# EAGLE board PT_2018_PB_4lyr_Rev1 (EAGLE 8.3.2)

Size 400.56 x 672.34 mm. Coordinates in mm from the lower left corner, seen from the top.
Outline: 0,456.44 0,672.34 165.1,672.34 165.1,456.44 0,456.44
Copper layers (1*2*15*16): Top 0.035mm / dielectric 1.5mm / Top-Mid(3v3) 0.035mm / dielectric 0.15mm / Bot-Mid(signal) 0.035mm / dielectric 0.2mm / Bottom 0.035mm
Design rules "default *": minimum track width 6mil, minimum drill 0.35mm, track to track 6mil, track to pad 6mil, pad to pad 6mil, via to via 6mil, smd to smd 6mil, copper to edge 40mil, drill to drill 6mil, minimum pad ring 10mil, minimum via ring 8mil, stop-mask expansion 4mil, vias tented up to drill 0mil, thermal gap 10mil
Net classes: 2 Ethernet: width 0.22 mm, clearance 0.152 mm

## Footprints (pad centres in the part's own frame; a part is rotated, then mirrored left to right if it is on the bottom)
OKI-78SR_HORIZ = drill 0.762 pad 1.422: 1 0,0; 2 -2.54,0; 3 -5.08,0
LARGE_TERMINAL_HOLE = drill 9.144 pad 18.288: P$1 0,0
C0603 = smd 1.1 x 1: 1 -0.85,0; 2 0.85,0
C1206 = smd 1.6 x 1.8: 1 -1.4,0; 2 1.4,0
0603 = smd 1.1 x 1: 1 -0.85,0; 2 0.85,0
0805 = smd 0.8 x 1.2: 1 -0.9,0; 2 0.9,0
E5-8,5 = drill 1.016 pad 2.54: + -2.54,0 | drill 1.016 pad 2.54 octagon: - 2.54,0
1206 = smd 1.6 x 1.8: 1 -1.4,0; 2 1.4,0
C_12.5MM = drill 0.7 square: + -2.5,0 | drill 0.7: - 2.5,0
CB429-17 = drill 1.397 long: A 8.89,0; C -8.89,0
APP45_12V_VERT_CONFIG = drill 4.064: GND 4.699,3.937; VCC 4.699,11.811
KEYSTONE-942 = drill 0.9: P$1 3.8,2.289; P$2 4.816,4.829; P$3 5.832,2.289; P$4 6.848,4.829; P$5 7.864,2.289; P$6 8.88,4.829; P$7 9.896,2.289; P$8 10.912,4.829 | hole 2.413: -0.023,-0.023; 14.76,-0.023
CON_2X5_50MIL = smd 0.74 x 2.6: P1 0,0; P2 0,4.008; P3 1.27,0; P4 1.27,4.008; P5 2.54,0; P6 2.54,4.008; P7 3.81,0; P8 3.81,4.008; P9 5.08,0; P10 5.08,4.008
APP45_12V_HORIZ_CONFIG = drill 4.064: 12V 28.194,3.937; GND 28.194,11.811
APP45_PCB_HORIZ_RIGHT = drill 4.064: P$1 28.194,3.969
CHIP-LED0603 = smd 0.8 x 0.8: A 0,-0.75; C 0,0.75
LED-1206 = smd 1.2 x 1.4: A -1.5,0; C 1.5,0
U-T48-QB-NO_TRIM = drill 1.3: 1 -25.4,7.62; 2 -25.4,0; 3 -25.4,-7.62 | drill 2: 4 25.4,-7.62; 8 25.4,7.62
D2PACK = smd 2.083 x 3.81: 1 2.54,-4.191; 2 7.62,-4.191 | smd 10.16 x 7.62: TAB 5.08,6.604
SOT323 = smd 0.7 x 0.7: 1 -0.65,-0.925; 2 0.65,-0.925; 3 0,0.925
DPAK = smd 1.6 x 3: 1 -2.28,-5.31; 3 2.28,-5.31 | smd 4.826 x 5.715: 4 0,1.588
R0603 = smd 1 x 1.1: 1 -0.85,0; 2 0.85,0
R1206 = smd 1.6 x 1.803: 1 -1.422,0; 2 1.422,0
SWITCH_6MM_6MM_TE_CON_SMD = smd 1.2 x 3.2: P$1 4.521,6.807; P$2 4.521,0; P$3 0,6.807; P$4 0,0
MOLEX-70543-0002 = drill 1.1 square: 1 2.54,0 | drill 1.1: 2 0,0; 3 -2.54,0
SO8 = smd 0.6 x 2.2: 1 -1.905,-2.6; 2 -0.635,-2.6; 3 0.635,-2.6; 4 1.905,-2.6; 5 1.905,2.6; 6 0.635,2.6; 7 -0.635,2.6; 8 -1.905,2.6
SOIC8_ACS711 = smd 1.92 x 2.2: 1 -1.27,-2.6; 4 1.27,-2.6 | smd 0.6 x 2.2: 5 1.905,2.6; 6 0.635,2.6; 7 -0.635,2.6; 8 -1.905,2.6
TO127P1435X457-8N = smd 0.864 x 2.692: 1 -3.81,-9.042; 2 -2.54,-9.042; 3 -1.27,-9.042; 4 0,-9.042; 5 1.27,-9.042; 6 2.54,-9.042; 7 3.81,-9.042 | smd 10.16 x 8.941: 8 0,0.152
SOIC16 = smd 0.6 x 1.55: 1 -4.445,-2.7; 2 -3.175,-2.7; 3 -1.905,-2.7; 4 -0.635,-2.7; 5 0.635,-2.7; 6 1.905,-2.7; 7 3.175,-2.7; 8 4.445,-2.7; 9 4.445,2.7; 10 3.175,2.7; 11 1.905,2.7; 12 0.635,2.7; 13 -0.635,2.7; 14 -1.905,2.7; 15 -3.175,2.7; 16 -4.445,2.7
TQFP-128 = smd 1.45 x 0.25: P$1 0,0; P$2 0,-0.4; P$3 0,-0.8; P$4 0,-1.2; P$5 0,-1.6; P$6 0,-2; P$7 0,-2.4; P$8 0,-2.8; P$9 0,-3.2; P$10 0,-3.6; P$11 0,-4; P$12 0,-4.4; P$13 0,-4.8; P$14 0,-5.2; P$15 0,-5.6; P$16 0,-6; P$17 0,-6.4; P$18 0,-6.8; P$19 0,-7.2; P$20 0,-7.6; P$21 0,-8; P$22 0,-8.4; P$23 0,-8.8; P$24 0,-9.2; P$25 0,-9.6; P$26 0,-10; P$27 0,-10.4; P$28 0,-10.8; P$29 0,-11.2; P$30 0,-11.6; P$31 0,-12; P$32 0,-12.4; P$65 15.45,-12.4; P$66 15.45,-12; P$67 15.45,-11.6; P$68 15.45,-11.2; P$69 15.45,-10.8; P$70 15.45,-10.4; P$71 15.45,-10; P$72 15.45,-9.6; P$73 15.45,-9.2; P$74 15.45,-8.8; P$75 15.45,-8.4; P$76 15.45,-8; P$77 15.45,-7.6; P$78 15.45,-7.2; P$79 15.45,-6.8; P$80 15.45,-6.4; P$81 15.45,-6; P$82 15.45,-5.6; P$83 15.45,-5.2; P$84 15.45,-4.8; P$85 15.45,-4.4; P$86 15.45,-4; P$87 15.45,-3.6; P$88 15.45,-3.2; P$89 15.45,-2.8; P$90 15.45,-2.4; P$91 15.45,-2; P$92 15.45,-1.6; P$93 15.45,-1.2; P$94 15.45,-0.8; P$95 15.45,-0.4; P$96 15.45,0 | smd 0.25 x 1.45: P$33 1.525,-13.925; P$34 1.925,-13.925; P$35 2.325,-13.925; P$36 2.725,-13.925; P$37 3.125,-13.925; P$38 3.525,-13.925; P$39 3.925,-13.925; P$40 4.325,-13.925; P$41 4.725,-13.925; P$42 5.125,-13.925; P$43 5.525,-13.925; P$44 5.925,-13.925; P$45 6.325,-13.925; P$46 6.725,-13.925; P$47 7.125,-13.925; P$48 7.525,-13.925; P$49 7.925,-13.925; P$50 8.325,-13.925; P$51 8.725,-13.925; P$52 9.125,-13.925; P$53 9.525,-13.925; P$54 9.925,-13.925; P$55 10.325,-13.925; P$56 10.725,-13.925; P$57 11.125,-13.925; P$58 11.525,-13.925; P$59 11.925,-13.925; P$60 12.325,-13.925; P$61 12.725,-13.925; P$62 13.125,-13.925; P$63 13.525,-13.925; P$64 13.925,-13.925; P$97 13.925,1.525; P$98 13.525,1.525; P$99 13.125,1.525; P$100 12.725,1.525; P$101 12.325,1.525; P$102 11.925,1.525; P$103 11.525,1.525; P$104 11.125,1.525; P$105 10.725,1.525; P$106 10.325,1.525; P$107 9.925,1.525; P$108 9.525,1.525; P$109 9.125,1.525; P$110 8.725,1.525; P$111 8.325,1.525; P$112 7.925,1.525; P$113 7.525,1.525; P$114 7.125,1.525; P$115 6.725,1.525; P$116 6.325,1.525; P$117 5.925,1.525; P$118 5.525,1.525; P$119 5.125,1.525; P$120 4.725,1.525; P$121 4.325,1.525; P$122 3.925,1.525; P$123 3.525,1.525; P$124 3.125,1.525; P$125 2.725,1.525; P$126 2.325,1.525; P$127 1.925,1.525; P$128 1.525,1.525
HX1198FNL = smd 0.76 x 1.67: P$1 0,0; P$2 1.27,0; P$3 2.54,0; P$4 3.81,0; P$5 5.08,0; P$6 6.35,0; P$7 7.62,0; P$8 8.89,0; P$9 8.89,8.55; P$10 7.62,8.55; P$11 6.35,8.55; P$12 5.08,8.55; P$13 3.81,8.55; P$14 2.54,8.55; P$15 1.27,8.55; P$16 0,8.55
SOIC8 = smd 0.6 x 2.2: 1 0.457,-0.813; 2 1.727,-0.813; 3 2.997,-0.813; 4 4.267,-0.813; 5 4.267,4.419; 6 2.997,4.419; 7 1.727,4.419; 8 0.457,4.419
OKI-78SR_HORIZ' = drill 0.9 pad 1.422: 1 0,0; 2 -2.54,0; 3 -5.08,0
SOT-223-6 = smd 0.6 x 2.2: 1 -2.54,-3.1; 2 -1.27,-3.1; 3 0,-3.1; 4 1.27,-3.1; 5 2.54,-3.1 | smd 3.5 x 2.2: 6 0,3.1
APP45_MOCO_VERT_CONFIG = drill 4.064: GND 3.937,3.175; VCC 3.937,11.049
BLOCK_3557-2 = drill 1.676 square: IN_1 16.637,-1.651; IN_2 16.637,-5.055; OUT_1 3.175,-1.651; OUT_2 3.175,-5.055
22-23-2021 = drill 1 long: 1 -1.27,0; 2 1.27,0
NDK3.2X2.5 = smd 1.4 x 1.2: P$1 0,0; P$2 2.2,0; P$3 2.2,1.6; P$4 0,1.6
CRYSTAL_32K_SMD = smd 2.5 x 1: P$1 0,1.25; P$2 0,-1.25 | smd 6 x 2.5: P$3 -6,0

## Placement (x,y rotation side)
3.3V-OKI  Q_OKI-78SR  [OKI-78SR_HORIZ]  288.29,74.17 0 top
5V-OKI  Q_OKI-78SR  [OKI-78SR_HORIZ]  309.88,74.17 0 top
BATT-NEG  TERMINAL_HOLE  [LARGE_TERMINAL_HOLE]  50.8,413.26 0 top
BATT-POS  TERMINAL_HOLE  [LARGE_TERMINAL_HOLE]  157.48,400.56 0 top
C1  0.1uF  [C0603]  345.44,-7.11 0 top  (outside the outline)
C2  0.1uF  [C0603]  353.06,-7.11 0 top  (outside the outline)
C3  0.1uF  [C0603]  360.68,-7.11 0 top  (outside the outline)
C4  0.1uF  [C0603]  368.3,-7.11 0 top  (outside the outline)
C5  1000pF  [C0603]  336.55,-7.11 0 top  (outside the outline)
C6  4700pF  [C1206]  157.48,-7.11 0 top  (outside the outline)
C7  0.1uF  [C0603]  375.92,-7.11 0 top  (outside the outline)
C8  0.1uF  [C0603]  383.54,-7.11 0 top  (outside the outline)
C9  0.1uF  [C0603]  391.16,-7.11 0 top  (outside the outline)
C10  0.1uF  [C0603]  398.78,-7.11 0 top  (outside the outline)
C11  0.1uF  [C0603]  406.4,-7.11 0 top  (outside the outline)
C12  0.1uF  [C0603]  3.81,-18.54 0 top  (outside the outline)
C13  1.0uF  [C0603]  11.43,-18.54 0 top  (outside the outline)
C14  2.2uF  [C0603]  19.05,-18.54 0 top  (outside the outline)
C15  12pF  [C0603]  57.15,-18.54 0 top  (outside the outline)
C16  12pF  [C0603]  64.77,-18.54 0 top  (outside the outline)
C17  0.1uF  [C0603]  26.67,-18.54 0 top  (outside the outline)
C18  12pF  [C0603]  72.39,-18.54 0 top  (outside the outline)
C19  12pF  [C0603]  80.01,-18.54 0 top  (outside the outline)
C20  0.1uF  [C0603]  34.29,-18.54 0 top  (outside the outline)
C21  0.1uF  [C0603]  41.91,-18.54 0 top  (outside the outline)
C22  2.2uF  [C0603]  49.53,-18.54 0 top  (outside the outline)
C23  10uF  [C1206]  165.1,-7.11 0 top  (outside the outline)
C24  10uF  [C1206]  171.45,-7.11 0 top  (outside the outline)
C25  10uF  [C1206]  177.8,-7.11 0 top  (outside the outline)
C26  10uF  [C1206]  184.15,-7.11 0 top  (outside the outline)
C27  10pF  [0603]  -35.56,-46.48 0 top  (outside the outline)
C.1  1nF  [0805]  232.41,-17.27 0 top  (outside the outline)
C.2  1nF  [0805]  236.22,-17.27 0 top  (outside the outline)
C.3  1nF  [0805]  240.03,-17.27 0 top  (outside the outline)
C.4  1nF  [0805]  243.84,-17.27 0 top  (outside the outline)
C.5  1nF  [0805]  247.65,-17.27 0 top  (outside the outline)
C.6  1nF  [0805]  251.46,-17.27 0 top  (outside the outline)
C.7  1nF  [0805]  255.27,-17.27 0 top  (outside the outline)
C.8  .1µF  [0805]  259.08,-17.27 0 top  (outside the outline)
C.9  .1µF  [0805]  262.89,-17.27 0 top  (outside the outline)
C.10  .1µF  [0805]  266.7,-17.27 0 top  (outside the outline)
C.11  .1µF  [0805]  270.51,-17.27 0 top  (outside the outline)
C.12  .1µF  [0805]  274.32,-17.27 0 top  (outside the outline)
C.13  .1µF  [0805]  278.13,-17.27 0 top  (outside the outline)
C.14  .1µF  [0805]  281.94,-17.27 0 top  (outside the outline)
C.15  .1µF  [0805]  285.75,-17.27 0 top  (outside the outline)
C.16  .1µF  [0805]  289.56,-17.27 0 top  (outside the outline)
C.17  .1µF  [0805]  293.37,-17.27 0 top  (outside the outline)
C.18  .1µF  [0805]  297.18,-17.27 0 top  (outside the outline)
C.19  .1µF  [0805]  300.99,-17.27 0 top  (outside the outline)
C.20  .1µF  [0805]  304.8,-17.27 0 top  (outside the outline)
C.21  .1µF  [0805]  308.61,-17.27 0 top  (outside the outline)
C.23  .1µF  [0805]  316.23,-17.27 0 top  (outside the outline)
C.24  .1µF  [0805]  320.04,-17.27 0 top  (outside the outline)
C.25  .1µF  [0805]  323.85,-17.27 0 top  (outside the outline)
C.26  330µF  [E5-8,5]  245.11,53.85 0 top
C.27  330µF  [E5-8,5]  275.59,53.85 0 top
C.28  330µF  [E5-8,5]  303.53,56.39 0 top
C.29  330µF  [E5-8,5]  336.55,53.85 0 top
C.30  330µF  [E5-8,5]  367.03,53.85 0 top
C.31  330µF  [E5-8,5]  397.51,53.85 0 top
C.35  2.2uF  [1206]  238.76,-7.11 0 top  (outside the outline)
C.36  2.2uF  [1206]  243.84,-7.11 0 top  (outside the outline)
C.37  2.2uF  [1206]  248.92,-7.11 0 top  (outside the outline)
C.39  1nF  [0805]  331.47,-17.27 0 top  (outside the outline)
C.40  1nF  [0805]  335.28,-17.27 0 top  (outside the outline)
C.41  1nF  [0805]  339.09,-17.27 0 top  (outside the outline)
C.42  1nF  [0805]  342.9,-17.27 0 top  (outside the outline)
C.43  1nF  [0805]  346.71,-17.27 0 top  (outside the outline)
C.44  1nF  [0805]  350.52,-17.27 0 top  (outside the outline)
C.45  10uF  [1206]  254,-7.11 0 top  (outside the outline)
C.46  10uF  [1206]  259.08,-7.11 0 top  (outside the outline)
C.47  10uF  [1206]  264.16,-7.11 0 top  (outside the outline)
C.48  .1uF  [0805]  354.33,-17.27 0 top  (outside the outline)
C.49  .1uF  [0805]  358.14,-17.27 0 top  (outside the outline)
C.50  .1uF  [0805]  361.95,-17.27 0 top  (outside the outline)
C.51  1mF  [C_12.5MM]  234.95,5.59 0 top
C.52  1mF  [C_12.5MM]  252.73,5.59 0 top
C.53  1mF  [C_12.5MM]  270.51,8.13 0 top
C.54  1mF  [C_12.5MM]  288.29,5.59 0 top
C.55  .1u  [0805]  365.76,-17.27 0 top  (outside the outline)
C.56  .1u  [0805]  369.57,-17.27 0 top  (outside the outline)
C.57  .1u  [0805]  373.38,-17.27 0 top  (outside the outline)
C.58  .1u  [0805]  377.19,-17.27 0 top  (outside the outline)
C.59  .1u  [0805]  381,-17.27 0 top  (outside the outline)
D1  1.5KE36A  [CB429-17]  209.55,28.45 0 top
D2  1.5KE36A  [CB429-17]  248.92,28.45 0 top
J1  APP_2POS_CONFIG12V_VERT  [APP45_12V_VERT_CONFIG]  219.71,235.46 0 top
J2  APP_2POS_CONFIG12V_VERT  [APP45_12V_VERT_CONFIG]  270.51,235.46 0 top
J3  APP_2POS_CONFIG12V_VERT  [APP45_12V_VERT_CONFIG]  321.31,235.46 0 top
J5  RJ45KEYSTONE-942  [KEYSTONE-942]  294.64,27.18 0 top
J6  JTAG_ARM_10PIN  [CON_2X5_50MIL]  358.14,5.59 0 top
J7  APP_2POS_CONFIG12V_HORIZ  [APP45_12V_HORIZ_CONFIG]  144.78,235.46 0 top
J8  APPPP45_PCB_HORIZ_RIGHT  [APP45_PCB_HORIZ_RIGHT]  361.95,171.96 0 top
LED1  GREEN  [CHIP-LED0603]  128.27,-9.65 0 top  (outside the outline)
LED2  GREEN  [CHIP-LED0603]  133.35,-9.65 0 top  (outside the outline)
LED3  ORANGE  [CHIP-LED0603]  123.19,-10.92 0 top  (outside the outline)
LED-1  [LED-1206]  170.18,-18.54 0 top  (outside the outline)
LED-2  [LED-1206]  175.26,-18.54 0 top  (outside the outline)
LED-3  [LED-1206]  180.34,-18.54 0 top  (outside the outline)
LED-4  [LED-1206]  185.42,-18.54 0 top  (outside the outline)
LED-5  [LED-1206]  190.5,-18.54 0 top  (outside the outline)
LED-6  [LED-1206]  195.58,-18.54 0 top  (outside the outline)
LED-7  [LED-1206]  200.66,-18.54 0 top  (outside the outline)
LED-9  [LED-1206]  210.82,-18.54 0 top  (outside the outline)
LED-10  [LED-1206]  215.9,-18.54 0 top  (outside the outline)
LED-11  [LED-1206]  220.98,-18.54 0 top  (outside the outline)
MARLIN-12V  UQW-12/20-T48NBS  [U-T48-QB-NO_TRIM]  111.76,118.62 0 top
NEMO-12V  UQW-12/20-T48NBS  [U-T48-QB-NO_TRIM]  187.96,118.62 0 top
Q1  Q_IRFS7437PbF  [D2PACK]  373.38,80.52 0 top
Q2  Q_IRFS7437PbF  [D2PACK]  12.7,51.31 0 top
Q3  Q_IRFS7437PbF  [D2PACK]  50.8,51.31 0 top
Q4  Q_IRFS7437PbF  [D2PACK]  88.9,51.31 0 top
Q5  Q_IRFS7437PbF  [D2PACK]  127,51.31 0 top
Q6  Q_IRFS7437PbF  [D2PACK]  165.1,51.31 0 top
Q7  Q_IRFS7437PbF  [D2PACK]  203.2,51.31 0 top
Q8  2N7002  [SOT323]  388.62,-18.54 0 top  (outside the outline)
Q10  MOSFET-NCHANNELFDD8780  [DPAK]  176.53,28.45 0 top
Q11  MOSFET-NCHANNELFDD8780  [DPAK]  185.42,28.45 0 top
Q12  2N7002  [SOT323]  396.24,-18.54 0 top  (outside the outline)
Q13  2N7002PW  [SOT323]  384.81,-18.54 0 top  (outside the outline)
R1  49.9  [R0603]  92.71,-18.54 0 top  (outside the outline)
R2  49.4  [R0603]  97.79,-18.54 0 top  (outside the outline)
R3  49.9  [R0603]  102.87,-18.54 0 top  (outside the outline)
R4  49.9  [R0603]  107.95,-18.54 0 top  (outside the outline)
R5  75  [R0603]  153.67,-18.54 0 top  (outside the outline)
R6  75  [R0603]  157.48,-18.54 0 top  (outside the outline)
R7  75  [R0603]  161.29,-18.54 0 top  (outside the outline)
R8  75  [R0603]  165.1,-18.54 0 top  (outside the outline)
R9  1M  [R1206]  228.6,-7.11 0 top  (outside the outline)
R10  330  [R0603]  113.03,-18.54 0 top  (outside the outline)
R11  330  [R0603]  118.11,-18.54 0 top  (outside the outline)
R12  1M  [R0603]  123.19,-18.54 0 top  (outside the outline)
R13  51  [R0603]  128.27,-18.54 0 top  (outside the outline)
R14  4.87k 1%  [R0603]  325.12,-7.11 0 top  (outside the outline)
R15  2k  [R0603]  133.35,-18.54 0 top  (outside the outline)
R16  100  [R0603]  138.43,-18.54 0 top  (outside the outline)
R17  10k  [R0603]  143.51,-18.54 0 top  (outside the outline)
R18  100k  [R0603]  86.36,-18.54 0 top  (outside the outline)
R19  330  [R0603]  148.59,-18.54 0 top  (outside the outline)
R.1  5kΩ  [1206]  269.24,-7.11 0 top  (outside the outline)
R.2  5kΩ  [1206]  274.32,-7.11 0 top  (outside the outline)
R.3  5kΩ  [1206]  279.4,-7.11 0 top  (outside the outline)
R.4  5kΩ  [1206]  284.48,-7.11 0 top  (outside the outline)
R.5  5kΩ  [1206]  289.56,-7.11 0 top  (outside the outline)
R.6  5kΩ  [1206]  294.64,-7.11 0 top  (outside the outline)
R.7  5kΩ  [1206]  299.72,-7.11 0 top  (outside the outline)
R.9  1kΩ  [1206]  309.88,-7.11 0 top  (outside the outline)
R.10  1kΩ  [1206]  314.96,-7.11 0 top  (outside the outline)
R.11  1kΩ  [1206]  320.04,-7.11 0 top  (outside the outline)
R.14  100k  [R1206]  190.5,-7.11 0 top  (outside the outline)
R.15  1k  [R1206]  209.55,-7.11 0 top  (outside the outline)
R.16  100k 1%  [R1206]  148.59,-7.11 0 top  (outside the outline)
R.17  10kΩ 1%  [R1206]  138.43,-7.11 0 top  (outside the outline)
R.18  1k  [R1206]  215.9,-7.11 0 top  (outside the outline)
R.19  100k  [R1206]  196.85,-7.11 0 top  (outside the outline)
S1  SWITCH_TACTILE  [SWITCH_6MM_6MM_TE_CON_SMD]  219.71,1.78 0 top
TEMP_1  SL03  [MOLEX-70543-0002]  308.61,5.59 0 top
U1  LT1910  [SO8]  410.21,8.13 0 top  (outside the outline)
U2  LT1910  [SO8]  5.08,-9.65 0 top  (outside the outline)
U3  LT1910  [SO8]  15.24,-9.65 0 top  (outside the outline)
U4  LT1910  [SO8]  25.4,-9.65 0 top  (outside the outline)
U5  LT1910  [SO8]  35.56,-9.65 0 top  (outside the outline)
U6  LT1910  [SO8]  45.72,-9.65 0 top  (outside the outline)
U7  LT1910  [SO8]  55.88,-9.65 0 top  (outside the outline)
U8  ACS722LLCTR-40AU-T  [SOIC8_ACS711]  66.04,23.37 0 top
U9  ACS722LLCTR-40AU-T  [SOIC8_ACS711]  76.2,23.37 0 top
U10  ACS722LLCTR-40AU-T  [SOIC8_ACS711]  86.36,23.37 0 top
U11  ACS722LLCTR-40AU-T  [SOIC8_ACS711]  96.52,23.37 0 top
U12  ACS722LLCTR-40AU-T  [SOIC8_ACS711]  106.68,23.37 0 top
U13  ACS722LLCTR-40AU-T  [SOIC8_ACS711]  116.84,23.37 0 top
U14  ACS722LLCTR-40AU-T  [SOIC8_ACS711]  127,23.37 0 top
U15  LT1910  [SO8]  66.04,-9.65 0 top  (outside the outline)
U16  LT1910  [SO8]  76.2,-9.65 0 top  (outside the outline)
U17  LM2678S-3.3  [TO127P1435X457-8N]  -22.86,-31.24 0 top  (outside the outline)
U18  ACS722LLCTR-40AU-T  [SOIC8_ACS711]  147.32,23.37 0 top
U19  ACS722LLCTR-40AU-T  [SOIC8_ACS711]  157.48,23.37 0 top
U20  ACS722LLCTR-40AU-T  [SOIC8_ACS711]  167.64,23.37 0 top
U21  MAX3232D  [SOIC16]  392.43,8.13 0 top
U22  TM4C1294NCPDT  [TQFP-128]  271.78,34.8 0 top
U23  HX1198FNL  [HX1198FNL]  345.44,3.05 0 top
U24  SLVU2.8-4  [SOIC8]  400.05,6.86 0 top
U25  OKI-78SR-5/1.5-W36HC  [OKI-78SR_HORIZ']  331.47,74.17 0 top
U26  TPS73733DCQ  [SOT-223-6]  87.63,-8.38 0 top  (outside the outline)
U27  OKI-78SR-5/1.5-W36HC  [OKI-78SR_HORIZ']  353.06,74.17 0 top
U$2  JACOB_SIG  [JACOB_SIG]  313.69,22.1 0 top
U$3  APP_2POS_CONFIGMOCO_VERT  [APP45_MOCO_VERT_CONFIG]  21.59,164.34 0 top
U$4  MRDT_LOGO  [MRDT_LOGO]  365.76,3.05 0 top
U$5  MOUNTING_HOLE#6  [#6_SCREW]  350.52,27.18 0 top
U$6  MOUNTING_HOLE#6  [#6_SCREW]  374.65,27.18 0 top
U$7  APP_2POS_CONFIGMOCO_VERT  [APP45_MOCO_VERT_CONFIG]  72.39,164.34 0 top
U$8  MOUNTING_HOLE#6  [#6_SCREW]  398.78,27.18 0 top
U$9  MOUNTING_HOLE#6  [#6_SCREW]  7.62,1.78 0 top
U$10  MOUNTING_HOLE#6  [#6_SCREW]  31.75,1.78 0 top
U$11  MOUNTING_HOLE#6  [#6_SCREW]  55.88,1.78 0 top
U$12  MOUNTING_HOLE#6  [#6_SCREW]  80.01,1.78 0 top
U$15  APP_2POS_CONFIGMOCO_VERT  [APP45_MOCO_VERT_CONFIG]  123.19,164.34 0 top
U$16  MOUNTING_HOLE#6  [#6_SCREW]  104.14,1.78 0 top
U$19  APP_2POS_CONFIGMOCO_VERT  [APP45_MOCO_VERT_CONFIG]  173.99,164.34 0 top
U$20  APP_2POS_CONFIGMOCO_VERT  [APP45_MOCO_VERT_CONFIG]  224.79,164.34 0 top
U$22  APP_2POS_CONFIGMOCO_VERT  [APP45_MOCO_VERT_CONFIG]  275.59,164.34 0 top
U$23  APP_2POS_CONFIGMOCO_VERT  [APP45_MOCO_VERT_CONFIG]  326.39,164.34 0 top
U$26  ATC_FUSE_BLOCK  [BLOCK_3557-2]  278.13,130.05 0 top
U$27  ATC_FUSE_BLOCK  [BLOCK_3557-2]  317.5,130.05 0 top
U$28  ATC_FUSE_BLOCK  [BLOCK_3557-2]  356.87,130.05 0 top
U$29  ATC_FUSE_BLOCK  [BLOCK_3557-2]  10.16,84.33 0 top
U$30  ATC_FUSE_BLOCK  [BLOCK_3557-2]  49.53,84.33 0 top
U$31  ATC_FUSE_BLOCK  [BLOCK_3557-2]  88.9,84.33 0 top
U$32  ATC_FUSE_BLOCK  [BLOCK_3557-2]  128.27,84.33 0 top
U$34  MOUNTING_HOLE#6  [#6_SCREW]  128.27,1.78 0 top
U$35  MOUNTING_HOLE#6  [#6_SCREW]  152.4,1.78 0 top
U$36  ATC_FUSE_BLOCK  [BLOCK_3557-2]  167.64,84.33 0 top
U$37  ATC_FUSE_BLOCK  [BLOCK_3557-2]  207.01,84.33 0 top
U$38  ATC_FUSE_BLOCK  [BLOCK_3557-2]  246.38,84.33 0 top
U$39  MOUNTING_HOLE#6  [#6_SCREW]  176.53,1.78 0 top
U$40  MOUNTING_HOLE#6  [#6_SCREW]  200.66,1.78 0 top
U$41  MRDT_LOGO  [MRDT_LOGO]  377.19,3.05 0 top
X1  22-23-2021  [22-23-2021]  331.47,6.86 0 top
Y1  NX3225GA  [NDK3.2X2.5]  226.06,-18.54 0 top  (outside the outline)
Y2  CRYATL_32K_SMD  [CRYSTAL_32K_SMD]  110.49,-8.38 0 top  (outside the outline)

## Library data of the parts
3.3V-OKI 5V-OKI BATT-NEG BATT-POS MARLIN-12V NEMO-12V Q1-Q7 U8-U14 U18-U20 = MRDT-2015-PowerBoard
C1-C26 C.26-C.31 R2-R19 R.14-R.19 = resistor
C27 = SparkFun-Capacitors; PROD_ID: CAP-11812
C.1-C.21 C.23-C.25 C.35-C.37 C.39-C.50 = SparkFun-Capacitors
C.51-C.54 = MRDT-2014-All
C.55-C.59 R.1-R.7 R.9-R.11 = SparkFun-Passives
D1 D2 = diode
J1-J3 J7 = MRDT-Connectors; COLOR1: YELLOW; COLOR2: BLACK
J5 J8 TEMP_1 = MRDT-Connectors
J6 = MRDT-Connectors; PARTNO: M50-3600542
LED1-LED3 = led
LED-1-LED-7 LED-9-LED-11 = SparkFun-LED
Q8 Q12 Q13 = SparkFun-DiscreteSemi; PROD_ID: TRANS-11151
Q10 Q11 = SparkFun-DiscreteSemi; PROD_ID: TRANS-09984
R1 = rcl
S1 = MRDT-UserInput
U1-U7 U15 U16 = Jake
U17 = LM2678S-3.3; AVAILABILITY: Good; DESCRIPTION: SIMPLE SWITCHER High Efficiency 5A Step-Down Voltage Regulator 7-DDPAK/TO-263 -40 to 125; MF: Texas Instruments; MP: LM2678S-3.3/NOPB; PACKAGE: TO-263-7 Texas Instruments; PRICE: 4.84 USD
U21 = MRDT-ICs; OPERATING_VOLTAGE: 3V3
U22 = MRDT-Microcontrollers
U23 U24 U26 = MRDT-ICs
U25 U27 = MRDT-ICs; VOUT: +5v
U$2 = Jacob Signature
U$3 U$7 U$15 U$19 U$20 U$22 U$23 = MRDT-Connectors; COLOR2: BLACK
U$4-U$6 U$8-U$12 U$16 U$26-U$32 U$34-U$40 = MRDT-Hardware
U$41 = MRDT-2015-General
X1 = con-molex; MF: MOLEX; MPN: 22-23-2021; OC_FARNELL: 1462926; OC_NEWARK: 25C3832
Y1 Y2 = MRDT-Passives

## Nets
3.3V: 3.3V-OKI.3 C.8.2 C.9.2 C.10.2 C.11.2 C.12.2 C.13.2 C.14.2 C.23.2 C.24.2 C.25.2 C.43.1 C.46.1 C.49.1 C.55.1 U8.8 U9.8 U10.8 U11.8 U12.8 U13.8 U14.8 U18.8 U19.8 U20.8 U21.16
5V: 5V-OKI.3 C.42.1 C.45.1 C.48.1 X1.2
12V-AUX-ACT: J3.VCC R.9.1 U18.4
12V-AUX-COM: J1.VCC R.10.1 U20.4
12V-AUX-LOGIC: J2.VCC R.11.1 U19.4
232_RX: TEMP_1.2 U21.13
232_TX: TEMP_1.3 U21.14
!RESET: J6.P10 R16.2 S1.P$3 S1.P$4
+3V3: C1.1 C2.1 C3.1 C4.1 C8.1 C9.1 C10.1 C11.1 C22.1 J6.P1 LED3.A R1.1 R2.1 R3.1 R4.1 R12.2 R13.2 R17.1 U22.P$7 U22.P$8 U22.P$9 U22.P$16 U22.P$26 U22.P$28 U22.P$39 U22.P$47 U22.P$51 U22.P$52 U22.P$69 U22.P$79 U22.P$90 U22.P$101 U22.P$113 U22.P$122 U23.P$2 U23.P$7 U26.2
+5V_ACT: C26.1 U27.3
+5V_LOGIC: C20.1 C24.1 R18.1 U25.3 U26.1
+12V_ACT: C25.1 J8.P$1 U27.1
+12V_LOGIC: C23.1 J7.12V U25.1
ACT-CTL: R.18.2 U22.P$109
ACT-SIG: U15.4 U22.P$31
ACT/COM-CTL: R.15.2 U22.P$103
COM-SIG: U16.4 U22.P$81
DRAIN-M1: C.15.2 Q1.TAB U1.6 U1.8 U8.4
DRAIN-M2: C.16.2 Q2.TAB U2.6 U2.8 U9.4
DRAIN-M3: C.17.2 Q3.TAB U3.6 U3.8 U10.4
DRAIN-M4: C.18.2 Q4.TAB U4.6 U4.8 U11.4
DRAIN-M5: C.19.2 Q5.TAB U5.6 U5.8 U12.4
DRAIN-M6: C.20.2 Q6.TAB U6.6 U6.8 U13.4
DRAIN-M7: C.21.2 Q7.TAB U7.6 U7.8 U14.4
EN0LED0: LED1.A U22.P$42
EN0LED1: LED2.A U22.P$46
EN0RXI_N [Ethernet]: R4.2 U22.P$53 U23.P$8
EN0RXI_P [Ethernet]: R3.2 U22.P$54 U23.P$6
EN0TXO_N [Ethernet]: R2.2 U22.P$56 U23.P$3
EN0TXO_P [Ethernet]: R1.2 U22.P$57 U23.P$1
FAN_CTL_1: Q13.1 U22.P$3
FILTER-M1: C.1.1 U8.6
FILTER-M2: C.2.1 U9.6
FILTER-M3: C.3.1 U10.6
FILTER-M4: C.4.1 U11.6
FILTER-M5: C.5.1 U12.6
FILTER-M6: C.6.1 U13.6
FILTER-M7: C.7.1 U14.6
GATE-M1: Q1.1 U1.5
GATE-M2: Q2.1 U2.5
GATE-M3: Q3.1 U3.5
GATE-M4: Q4.1 U4.5
GATE-M5: Q5.1 U5.5
GATE-M6: Q6.1 U6.5
GATE-M7: Q7.1 U7.5
GND: 3.3V-OKI.2 5V-OKI.2 BATT-NEG.P$1 C1.2 C2.2 C3.2 C4.2 C6.2 C7.2 C8.2 C9.2 C10.2 C11.2 C12.2 C13.2 C14.2 C15.2 C16.2 C17.2 C18.2 C19.2 C20.2 C21.2 C22.2 C23.2 C24.2 C25.2 C26.2 C.1.2 C.2.2 C.3.2 C.4.2 C.5.2 C.6.2 C.7.2 C.8.1 C.9.1 C.10.1 C.11.1 C.12.1 C.13.1 C.14.1 C.15.1 C.16.1 C.17.1 C.18.1 C.19.1 C.20.1 C.21.1 C.23.1 C.24.1 C.25.1 C.26.- C.27.- C.28.- C.29.- C.30.- C.31.- C.35.2 C.36.2 C.37.2 C.39.2 C.40.2 C.41.2 C.42.2 C.43.2 C.44.2 C.45.2 C.46.2 C.47.2 C.48.2 C.49.2 C.50.2 C.51.- C.52.- C.53.- C.54.- C.55.2 C.58.2 C.59.2 D1.A D2.A J1.GND J2.GND J3.GND J6.P3 J6.P5 J7.GND LED-1.C LED-2.C LED-3.C LED-4.C LED-5.C LED-6.C LED-7.C LED-9.C LED-10.C LED-11.C MARLIN-12V.3 MARLIN-12V.4 NEMO-12V.3 NEMO-12V.4 Q8.2 Q12.2 Q13.2 R9.1 R10.2 R11.2 R14.1 R19.2 R.14.2 R.17.1 R.19.2 S1.P$1 S1.P$2 TEMP_1.1 U1.1 U2.1 U3.1 U4.1 U5.1 U6.1 U7.1 U8.5 U9.5 U10.5 U11.5 U12.5 U13.5 U14.5 U15.1 U16.1 U17.8 U18.5 U19.5 U20.5 U21.15 U22.P$10 U22.P$17 U22.P$48 U22.P$55 U22.P$58 U22.P$80 U22.P$114 U25.2 U26.3 U26.6 U27.2 U$3.GND U$7.GND U$15.GND U$19.GND U$20.GND U$22.GND U$23.GND
IMEAS-ACT: U20.7 U22.P$13
IMEAS-COM: U19.7 U22.P$15
IMEAS-LOGIC: U18.7 U22.P$14
IMEAS-M1: U8.7 U22.P$21
IMEAS-M2: U9.7 U22.P$20
IMEAS-M3: U10.7 U22.P$19
IMEAS-M4: U11.7 U22.P$125
IMEAS-M5: U12.7 U22.P$18
IMEAS-M6: U13.7 U22.P$120
IMEAS-M7: U14.7 U22.P$121
LEDLINE-M1: LED-1.A R.1.2
LEDLINE-M2: LED-2.A R.2.2
LEDLINE-M3: LED-3.A R.3.2
LEDLINE-M4: LED-4.A R.4.2
LEDLINE-M5: LED-5.A R.5.2
LEDLINE-M6: LED-6.A R.6.2
LEDLINE-M7: LED-7.A R.7.2
N$1: C.26.+ NEMO-12V.8 U$30.IN_1 U$30.IN_2
N$2: C27.2 U17.3
N$3: MARLIN-12V.2 Q12.3
N$4: C.41.1 U20.6
N$5: C27.1 U17.1
N$6: LED-9.A R.9.2
N$7: LED-11.A R.11.2
N$8: NEMO-12V.2 Q8.3
N$9: C.28.+ C.29.+ C.30.+ C.31.+ C.36.1 C.37.1 MARLIN-12V.8 U$31.IN_1 U$31.IN_2 U$32.IN_1 U$32.IN_2
N$11: C.58.1 U21.2
N$12: C.39.1 U18.6
N$15: C.40.1 U19.6
N$16: LED-10.A R.10.2
N$17: Q11.1 U16.5
N$18: C.27.+ C.35.1 U18.1 U$30.OUT_1 U$30.OUT_2
N$19: Q11.3 U19.1
N$20: Q11.4 U16.6 U16.8 U$31.OUT_1 U$31.OUT_2
N$21: Q10.4 U15.6 U15.8 U$32.OUT_1 U$32.OUT_2
N$22: Q10.3 U20.1
N$25: Q8.1 R.18.1 R.19.1
N$28: Q10.1 U15.5
N$40: C.56.1 U21.1
N$42: C.56.2 U21.3
N$43: C.57.1 U21.4
N$44: C.57.2 U21.5
N$45: C.59.1 U21.6
N$66: Q13.3 X1.1
N$114: Q12.1 R.14.1 R.15.1
N_$1: R5.2 U23.P$15
N_$3: R6.2 U23.P$10
N_$4: J5.P$7 U23.P$14 U24.2 U24.7
N_$5: J5.P$6 U23.P$11 U24.3 U24.6
N_$6: J5.P$8 U23.P$16 U24.1 U24.8
N_$7: J5.P$3 U23.P$9 U24.4 U24.5
N_$8: LED2.C R11.1
N_$9: LED1.C R10.1
N_$10: C7.1 R13.1 U22.P$68
N_$11: J5.P$4 J5.P$5 R7.2
N_$12: R12.1 U22.P$64
N_$13: J5.P$1 J5.P$2 R8.2
N_$14: C5.1 R5.1 R6.1 R7.1 R8.1
N_$15: C5.2 C6.1 R9.2
N_$16: C12.1 C13.1 C14.1 U22.P$87 U22.P$115
N_$17: R15.2 U22.P$89
N_$18: C16.1 U22.P$88 Y1.P$3
N_$19: R14.2 U22.P$59
N_$20: C17.1 R16.1 R17.2 U22.P$70
N_$21: C15.1 R15.1 Y1.P$1
N_$22: C18.1 U22.P$67 Y2.P$2
N_$23: C19.1 U22.P$66 Y2.P$1
N_$25: R18.2 U26.5
N_$26: LED3.C R19.1
N_$27: C21.1 U26.4
RX: J6.P7 U22.P$33
SER_RX: U21.12 U22.P$25
SER_TX: U21.11 U22.P$24
SIG-M1: U1.4 U22.P$106
SIG-M2: U2.4 U22.P$41
SIG-M3: U3.4 U22.P$29
SIG-M4: U4.4 U22.P$104
SIG-M5: U5.4 U22.P$30
SIG-M6: U6.4 U22.P$61
SIG-M7: U7.4 U22.P$60
SOURCE-M1: Q1.2 R.1.1 U$3.VCC
SOURCE-M2: Q2.2 R.2.1 U$23.VCC
SOURCE-M3: Q3.2 R.3.1 U$7.VCC
SOURCE-M4: Q4.2 R.4.1 U$15.VCC
SOURCE-M5: Q5.2 R.5.1 U$19.VCC
SOURCE-M6: Q6.2 R.6.1 U$20.VCC
SOURCE-M7: Q7.2 R.7.1 U$22.VCC
TARGET_TCK/SWCLK: J6.P4 U22.P$100
TARGET_TDI: J6.P8 U22.P$98
TARGET_TDO/SWO: J6.P6 U22.P$97
TARGET_TMS/SWDIO: J6.P2 U22.P$99
TX: J6.P9 U22.P$34
V_BATT: 3.3V-OKI.1 5V-OKI.1 BATT-POS.P$1 C.44.1 C.47.1 C.50.1 C.51.+ C.52.+ C.53.+ C.54.+ D1.C D2.C MARLIN-12V.1 NEMO-12V.1 R.16.2 U17.2 U$26.IN_1 U$26.IN_2 U$27.IN_1 U$27.IN_2 U$28.IN_1 U$28.IN_2 U$29.IN_1 U$29.IN_2 U$36.IN_1 U$36.IN_2 U$37.IN_1 U$37.IN_2 U$38.IN_1 U$38.IN_2
V_BATT_M1: U8.1 U$26.OUT_1 U$26.OUT_2
V_BATT_M2: U9.1 U$27.OUT_1 U$27.OUT_2
V_BATT_M3: U10.1 U$36.OUT_1 U$36.OUT_2
V_BATT_M4: U11.1 U$37.OUT_1 U$37.OUT_2
V_BATT_M5: U12.1 U$38.OUT_1 U$38.OUT_2
V_BATT_M6: U13.1 U$29.OUT_1 U$29.OUT_2
V_BATT_M7: U14.1 U$28.OUT_1 U$28.OUT_2
VMEAS-VBATT: R.16.1 R.17.2 U22.P$124

## Tracks (layer width: path | path; a pad name or v marks a point on that pad's centre or on a via)
3.3V  (25 unrouted)
5V  (4 unrouted)
12V-AUX-ACT  (2 unrouted)
12V-AUX-COM  (2 unrouted)
12V-AUX-LOGIC  (2 unrouted)
232_RX  (1 unrouted)
232_TX  (1 unrouted)
!RESET  (3 unrouted)
+3V3  (36 unrouted)
+5V_ACT  (1 unrouted)
+5V_LOGIC  (4 unrouted)
+12V_ACT  (2 unrouted)
+12V_LOGIC  (2 unrouted)
ACT-CTL  (1 unrouted)
ACT-SIG  (1 unrouted)
ACT/COM-CTL  (1 unrouted)
COM-SIG  (1 unrouted)
DRAIN-M1  (4 unrouted)
DRAIN-M2  (4 unrouted)
DRAIN-M3  (4 unrouted)
DRAIN-M4  (4 unrouted)
DRAIN-M5  (4 unrouted)
DRAIN-M6  (4 unrouted)
DRAIN-M7  (4 unrouted)
EN0LED0  (1 unrouted)
EN0LED1  (1 unrouted)
EN0RXI_N  (2 unrouted)
EN0RXI_P  (2 unrouted)
EN0TXO_N  (2 unrouted)
EN0TXO_P  (2 unrouted)
FAN_CTL_1  (1 unrouted)
FILTER-M1  (1 unrouted)
FILTER-M2  (1 unrouted)
FILTER-M3  (1 unrouted)
FILTER-M4  (1 unrouted)
FILTER-M5  (1 unrouted)
FILTER-M6  (1 unrouted)
FILTER-M7  (1 unrouted)
GATE-M1  (1 unrouted)
GATE-M2  (1 unrouted)
GATE-M3  (1 unrouted)
GATE-M4  (1 unrouted)
GATE-M5  (1 unrouted)
GATE-M6  (1 unrouted)
GATE-M7  (1 unrouted)
GND  (154 unrouted)
IMEAS-ACT  (1 unrouted)
IMEAS-COM  (1 unrouted)
IMEAS-LOGIC  (1 unrouted)
IMEAS-M1  (1 unrouted)
IMEAS-M2  (1 unrouted)
IMEAS-M3  (1 unrouted)
IMEAS-M4  (1 unrouted)
IMEAS-M5  (1 unrouted)
IMEAS-M6  (1 unrouted)
IMEAS-M7  (1 unrouted)
LEDLINE-M1  (1 unrouted)
LEDLINE-M2  (1 unrouted)
LEDLINE-M3  (1 unrouted)
LEDLINE-M4  (1 unrouted)
LEDLINE-M5  (1 unrouted)
LEDLINE-M6  (1 unrouted)
LEDLINE-M7  (1 unrouted)
N$1  (3 unrouted)
N$2  (1 unrouted)
N$3  (1 unrouted)
N$4  (1 unrouted)
N$5  (1 unrouted)
N$6  (1 unrouted)
N$7  (1 unrouted)
N$8  (1 unrouted)
N$9  (10 unrouted)
N$11  (1 unrouted)
N$12  (1 unrouted)
N$15  (1 unrouted)
N$16  (1 unrouted)
N$17  (1 unrouted)
N$18  (4 unrouted)
N$19  (1 unrouted)
N$20  (4 unrouted)
N$21  (4 unrouted)
N$22  (1 unrouted)
N$25  (2 unrouted)
N$28  (1 unrouted)
N$40  (1 unrouted)
N$42  (1 unrouted)
N$43  (1 unrouted)
N$44  (1 unrouted)
N$45  (1 unrouted)
N$66  (1 unrouted)
N$114  (2 unrouted)
N_$1  (1 unrouted)
N_$3  (1 unrouted)
N_$4  (3 unrouted)
N_$5  (3 unrouted)
N_$6  (3 unrouted)
N_$7  (3 unrouted)
N_$8  (1 unrouted)
N_$9  (1 unrouted)
N_$10  (2 unrouted)
N_$11  (2 unrouted)
N_$12  (1 unrouted)
N_$13  (2 unrouted)
N_$14  (4 unrouted)
N_$15  (2 unrouted)
N_$16  (4 unrouted)
N_$17  (1 unrouted)
N_$18  (2 unrouted)
N_$19  (1 unrouted)
N_$20  (3 unrouted)
N_$21  (2 unrouted)
N_$22  (2 unrouted)
N_$23  (2 unrouted)
N_$25  (1 unrouted)
N_$26  (1 unrouted)
N_$27  (1 unrouted)
RX  (1 unrouted)
SER_RX  (1 unrouted)
SER_TX  (1 unrouted)
SIG-M1  (1 unrouted)
SIG-M2  (1 unrouted)
SIG-M3  (1 unrouted)
SIG-M4  (1 unrouted)
SIG-M5  (1 unrouted)
SIG-M6  (1 unrouted)
SIG-M7  (1 unrouted)
SOURCE-M1  (2 unrouted)
SOURCE-M2  (2 unrouted)
SOURCE-M3  (2 unrouted)
SOURCE-M4  (2 unrouted)
SOURCE-M5  (2 unrouted)
SOURCE-M6  (2 unrouted)
SOURCE-M7  (2 unrouted)
TARGET_TCK/SWCLK  (1 unrouted)
TARGET_TDI  (1 unrouted)
TARGET_TDO/SWO  (1 unrouted)
TARGET_TMS/SWDIO  (1 unrouted)
TX  (1 unrouted)
V_BATT  (29 unrouted)
V_BATT_M1  (2 unrouted)
V_BATT_M2  (2 unrouted)
V_BATT_M3  (2 unrouted)
V_BATT_M4  (2 unrouted)
V_BATT_M5  (2 unrouted)
V_BATT_M6  (2 unrouted)
V_BATT_M7  (2 unrouted)
VMEAS-VBATT  (2 unrouted)